# Altium PCB PCB6.PcbDoc
Units mm, origin at the board's own origin, x right, y up, seen from the top; angles counter-clockwise.
Board outline 43.07 x 32.08 mm, 2 copper layers (Top Layer, Bottom Layer); 34 components, 39 nets, 169 pads, 53 vias.
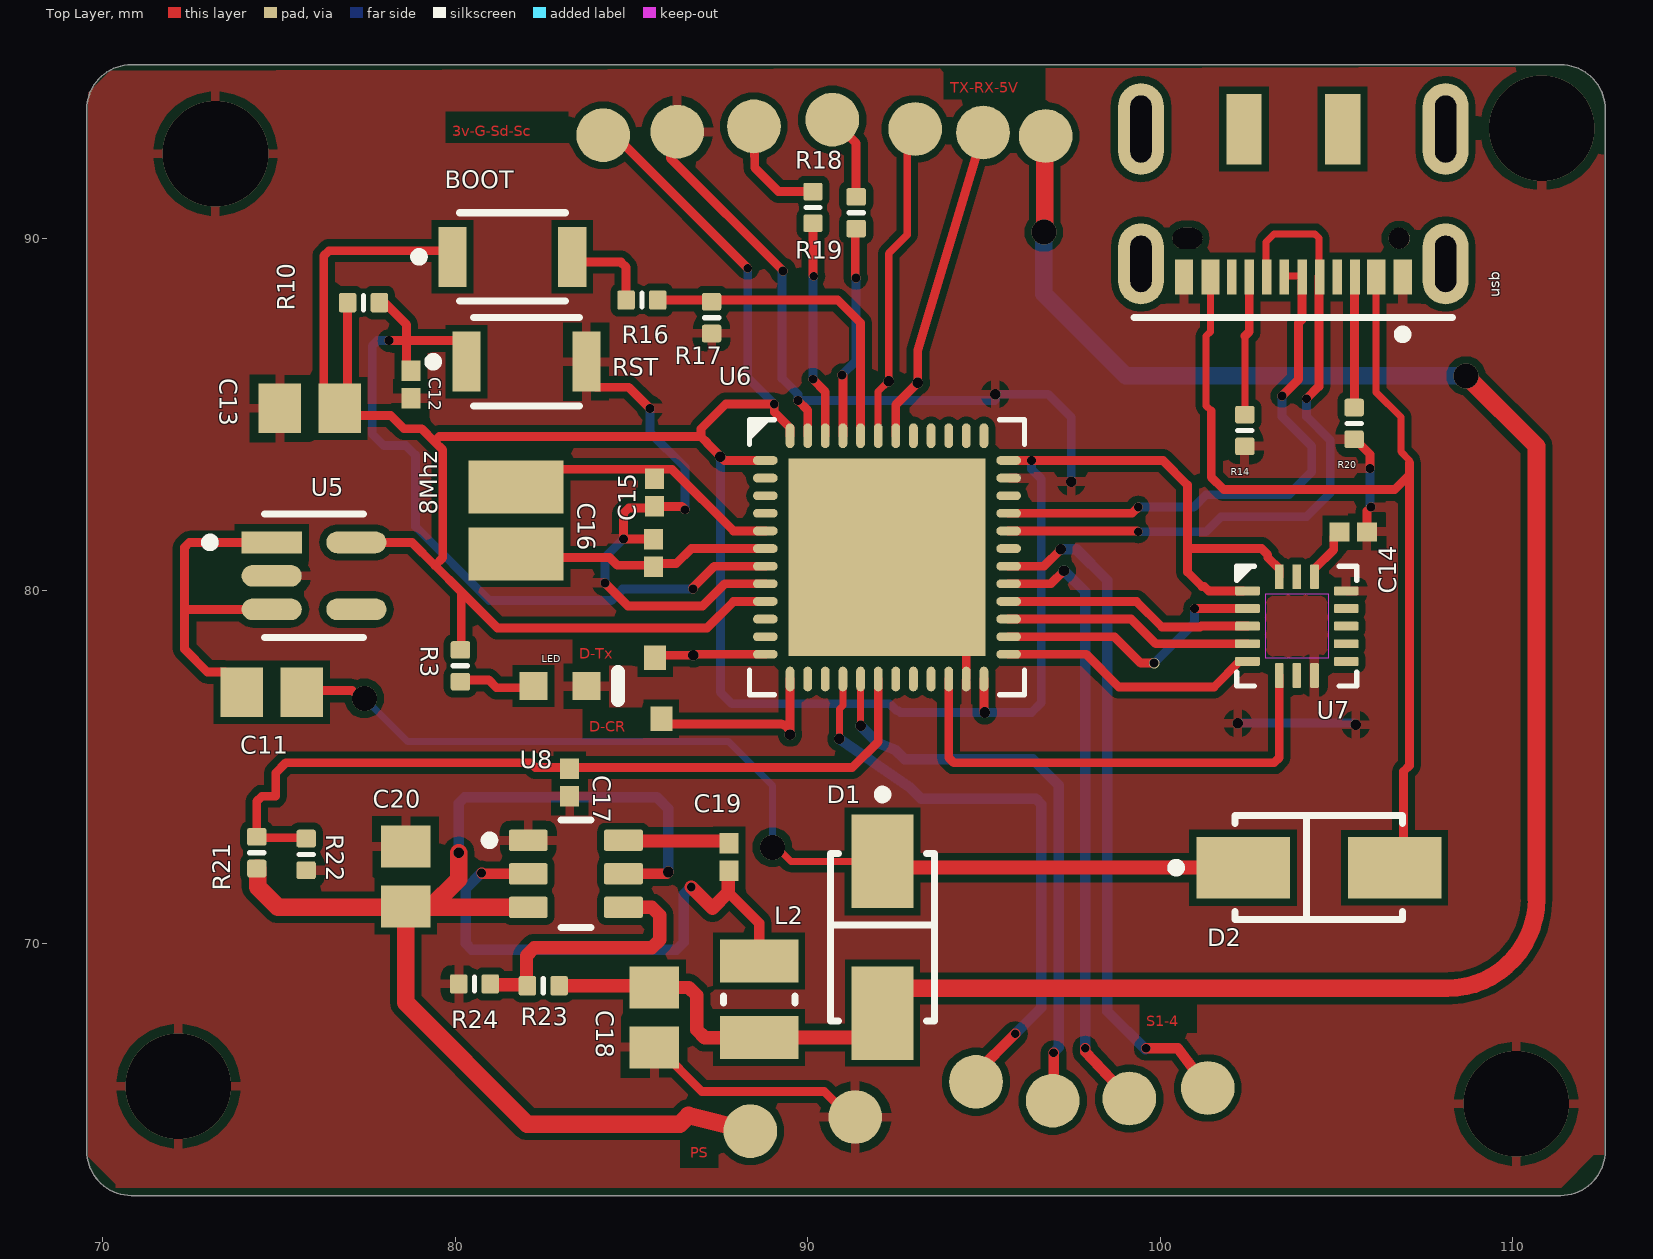
[diagram p0: Top Layer view]
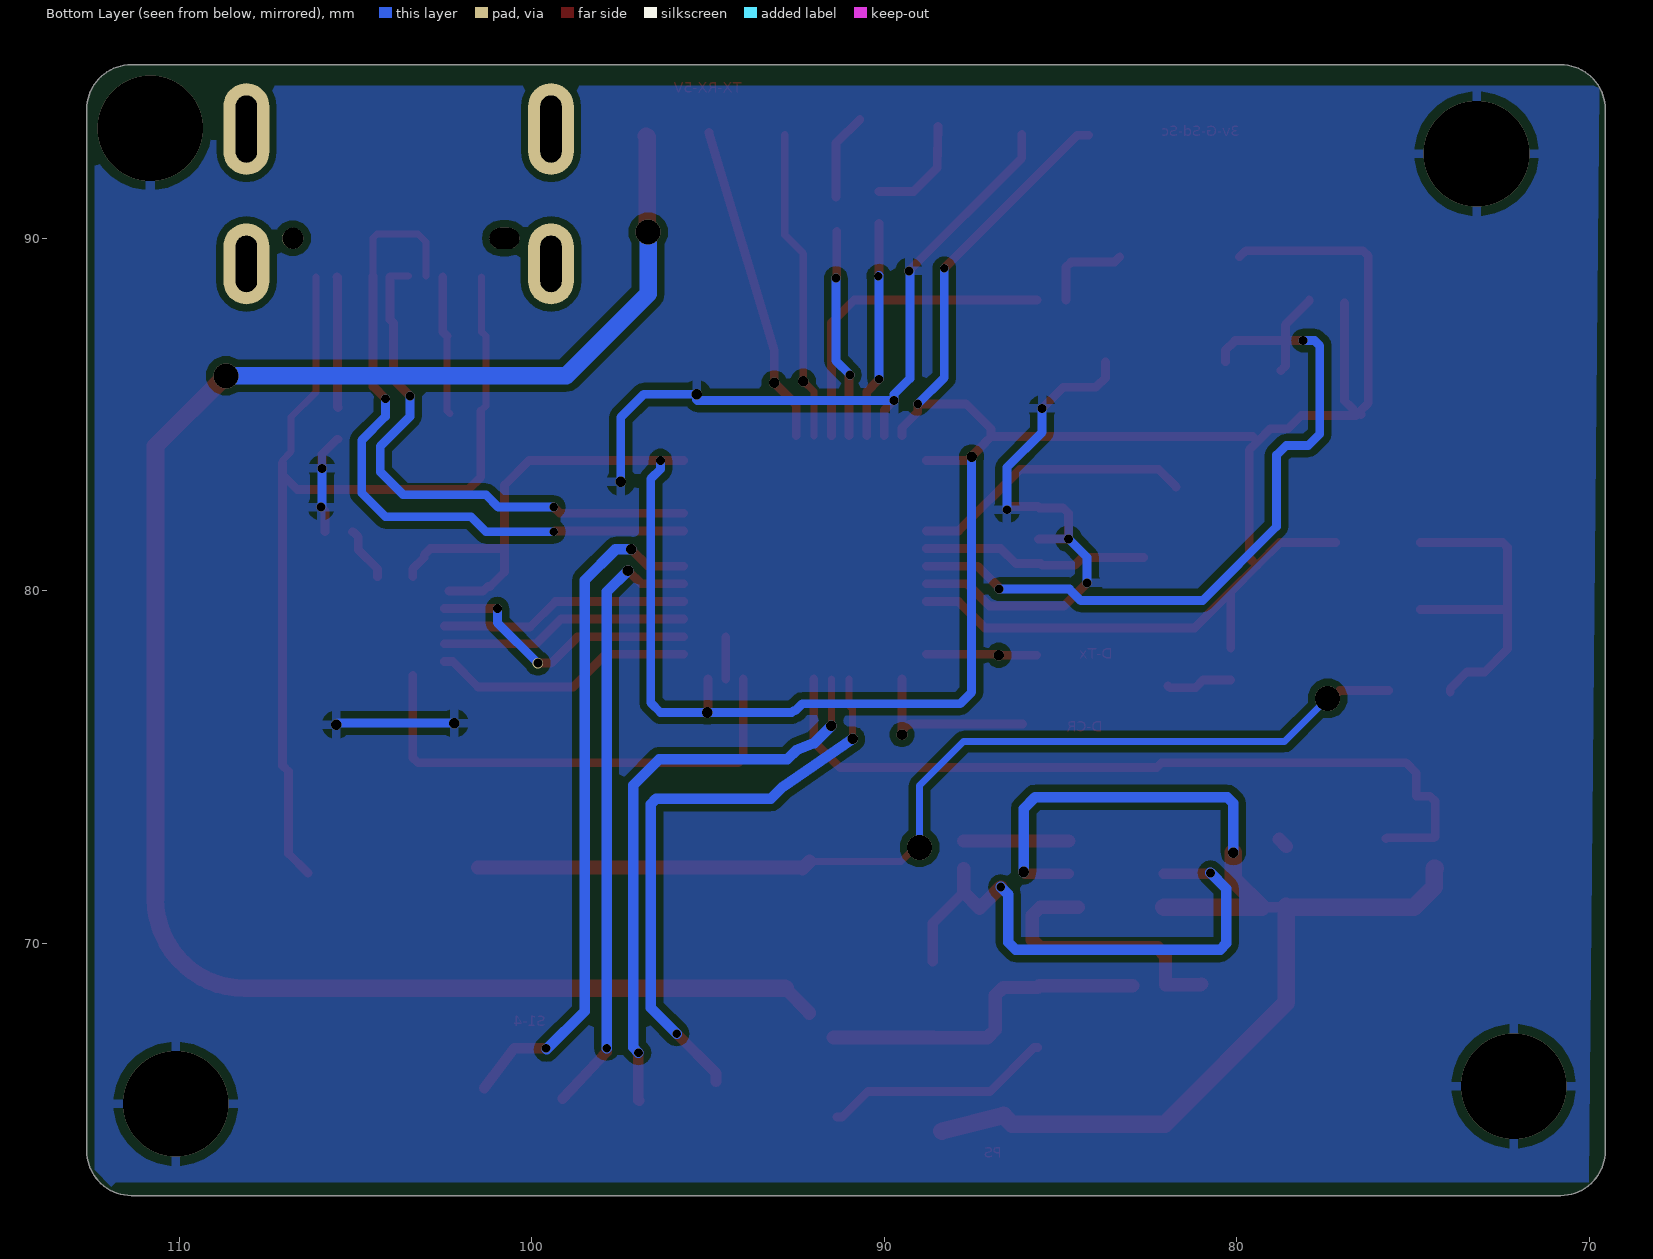
[diagram p1: Bottom Layer view, seen from below]
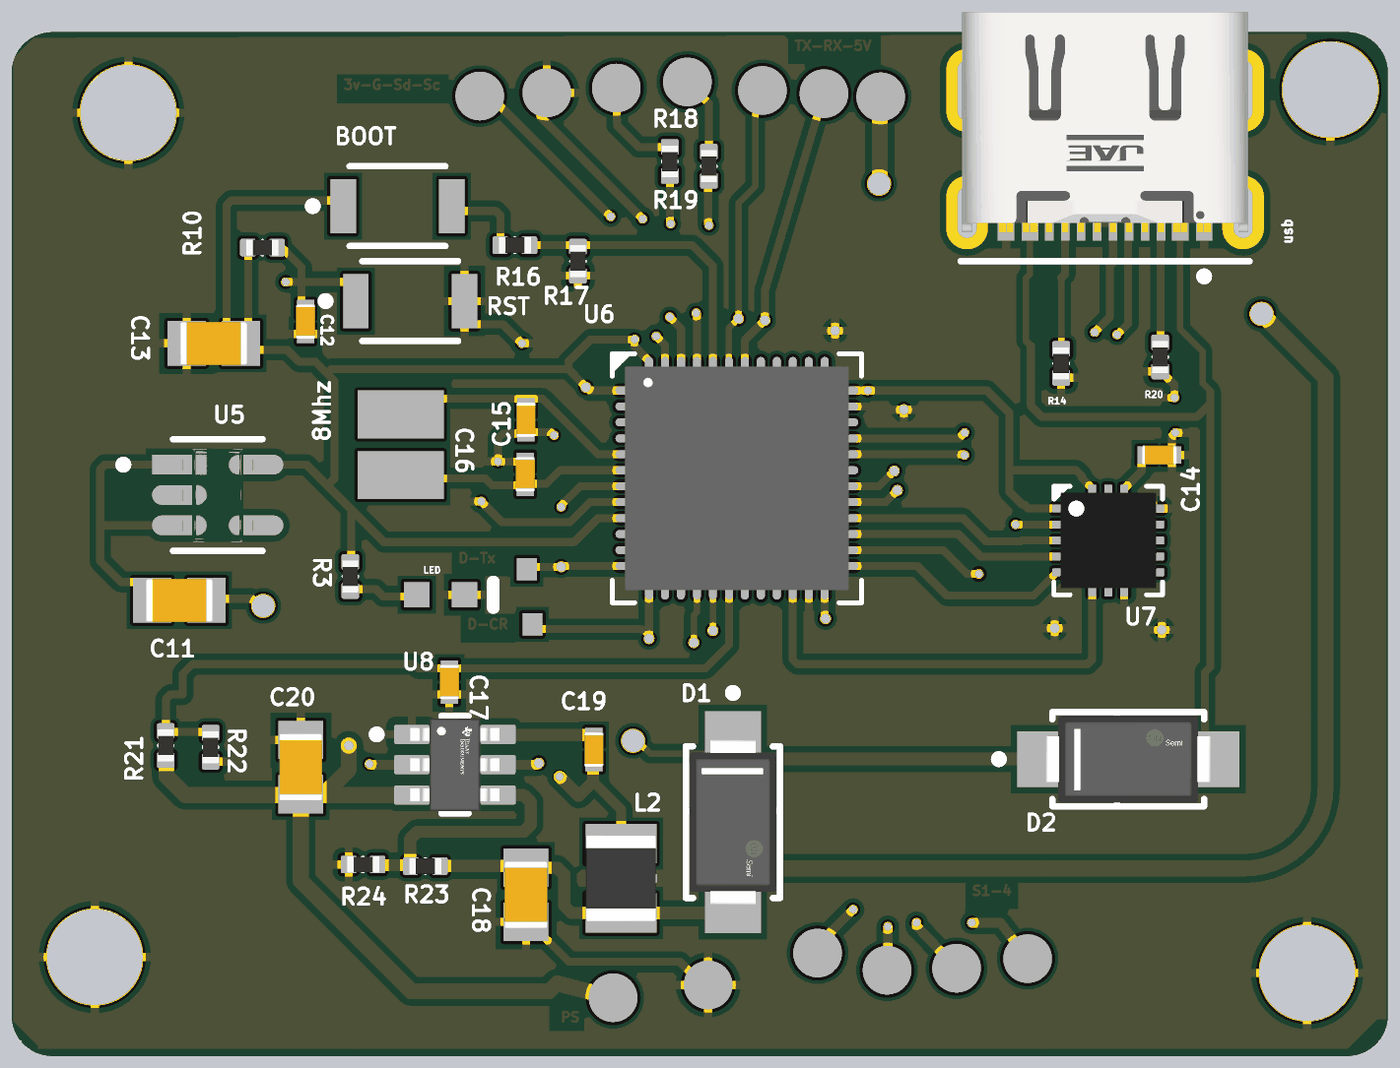
[diagram p2: 3D render of the assembled board from above, using the file's embedded part models]

## Layer stack, top to bottom
Top Solder: solder mask 0.0102, Solder Resist, Dk 3.5
Top Layer: signal copper 0.0356
Dielectric 1: dielectric 0.32, FR-4, Dk 4.8
Bottom Layer: signal copper 0.0356
Bottom Solder: solder mask 0.0102, Solder Resist, Dk 3.5

## Board outline
69.55,64.12 ccw(c70.82,64.12) 70.82,62.85 111.355,62.85 ccw(c111.355,64.12) 112.625,64.12 112.625,93.655 ccw(c111.355,93.655) 111.355,94.925 70.82,94.925 ccw(c70.82,93.655) 69.55,93.655

## Design rules (kind name [scope] priority, off if disabled: settings)
Clearance [All] p1: gap=0.2 ignorepadtopadclearanceinfootprint=FALSE
HoleSize [All] p1: absolutevalues=TRUE maxlimit=4 minlimit=0.025 maxpercent=80.000 minpercent=20.000
MinimumSolderMaskSliver [All] p1: minsoldermaskwidth=0
PolygonConnect [All] p1: connectstyle=Relief reliefconductorwidth=0.254 reliefentries=4 polygonreliefangle="90 Angle" airgapwidth=0.254
RoutingVias [All] p1: holewidth=0.711 width=1.27 viastyle="Through Hole" minholewidth=0.711 minwidth=1.27 maxholewidth=0.711 maxwidth=1.27
SilkToSilkClearance [All] p1: silktosilkclearance=0
SolderMaskExpansion [All] p1: expansion=0.102 istentingtop=FALSE
SupplyNets "Schematic Supply Nets" [InNet('GND')] p1: voltage=0.000
Width [All] p1: maxlimit=1.5 minlimit=0.15 preferedwidth=0.25
27 further rules are at their usual default settings.

## Classes and differential pairs
net class DS?_Nets: NetDS?_1 NetDS?_2
net class U8_Nets: GND NetC19_1 NetC19_2 NetR23_2 psu
net class U7_Nets: GND NetC14_1 NetU6_22 NetU6_25 NetU6_26 NetU6_27 NetU6_28 NetU7_7 NetU7_9 NetU7_10 NetU7_11 NetU7_12 NetU7_15
net class U6_Nets: "Drone CR" "Drone TX" "ELRS RX" "ELRS TX" GND Net8Mhz_1 NetC12_1 NetC17_1 NetJ?_A6 NetJ?_A7 NetR16_2 NetR18_1 NetR19_1 NetU6_2 NetU6_3 NetU6_4 NetU6_6 NetU6_10 NetU6_11 NetU6_14 NetU6_15 NetU6_19 NetU6_20 NetU6_21 NetU6_22 NetU6_25 NetU6_26 NetU6_27 NetU6_28 NetU6_31 NetU6_34 NetU6_37 NetU6_38 NetU6_39 NetU6_40 NetU6_41 "S1 ESC" "S2 ESC" "S3 ESC" "S4 ESC"
net class U5_Nets: GND NetC11_2 NetU5_4
net class SW3_Nets: GND NetC12_1
net class R24_Nets: GND NetR23_2
net class R23_Nets: NetC18_1 NetR23_2
net class R22_Nets: GND NetC17_1
net class R21_Nets: NetC17_1 psu
net class R20_Nets: GND NetJ?_A5
net class R19_Nets: NetR19_1 "sda oled"
net class R18_Nets: NetR18_1 "scl oled"
net class R17_Nets: GND NetR16_2
net class R16_Nets: NetR16_2
net class R14_Nets: GND NetJ?_B5
net class R10_Nets: NetC12_1
net class R3_Nets: NetD3_1
net class L2_Nets: NetC18_1 NetC19_2
net class J?_Nets: GND NetD2_1 NetJ?_A5 NetJ?_A6 NetJ?_A7 NetJ?_A8 NetJ?_B5 NetJ?_B8
net class D3_Nets: GND NetD3_1
net class D2_Nets: NetC11_1 NetD2_1
net class D1_Nets: NetC11_1 NetC18_1
net class C20_Nets: GND psu
net class C19_Nets: NetC19_1 NetC19_2
net class C18_Nets: GND NetC18_1
net class C17_Nets: GND NetC17_1
net class C16_Nets: GND Net8Mhz_2
net class C15_Nets: GND Net8Mhz_1
net class C14_Nets: GND NetC14_1
net class C13_Nets: GND
net class C12_Nets: GND NetC12_1
net class C11_Nets: NetC11_1 NetC11_2
net class 8Mhz_Nets: Net8Mhz_1 Net8Mhz_2

## Components (designator, comment, footprint, x,y, rotation, side; value= is the part's Value field where it differs from the comment)
8Mhz "NX3225GD-8MHZ-STD-CRA-3" NDK-NX3225GD-8MHZ-STD-CRA-3_V 81.725,82 r270 top
BOOT "B3U-1000P" OMRON-B3U-1000_V 81.625,89.475 r0 top
C11 "Capacitor 10 uF +/- 10% 16 V 0805" CAPC2013X135X45NL10T25 74.8,77.125 r180 top value=10µF
C12 "Capacitor 0.1 uF +/- 5% 16 V 0402" CAPC1005X56X25LL10T15 78.75,85.86 r270 top value=100nF
C13 "Capacitor 10 uF +/- 10% 16 V 0805" CAPC2013X135X45NL10T25 75.875,85.175 r180 top value=10µF
C14 "Capacitor 0.1 uF +/- 5% 16 V 0402" CAPC1005X56X25LL10T15 105.475,81.675 r0 top value=100nF
C15 "Capacitor 0.1 uF +/- 5% 16 V 0402" CAPC1005X56X25LL10T15 85.65,82.785 r270 top value=0.020nF
C16 "Capacitor 0.1 uF +/- 5% 16 V 0402" CAPC1005X56X25LL10T15 85.625,81.075 r90 top value=0.020nF
C17 "Capacitor 0.1 uF +/- 5% 16 V 0402" CAPC1005X56X25LL10T15 83.25,74.565 r270 top value=100nF
C18 "Capacitor 10 uF +/- 10% 16 V 0805" CAPC2013X135X45NL10T25 85.65,67.9 r270 top value=10µF
C19 "Capacitor 0.1 uF +/- 5% 16 V 0402" CAPC1005X56X25LL10T15 87.775,72.45 r270 top value=100nF
C20 "Capacitor 10 uF +/- 10% 16 V 0805" CAPC2013X135X45NL10T25 78.6,71.9 r90 top value=10µF
D1 "SS14" FP-403AE-MFG 92.125,70.175 r90 top
D2 "SS14" FP-403AE-MFG 104.5,72.15 r180 top
L2 "LQM2HPN2R2MG0L" INDC2520X100X60NL20T20 88.625,68.415 r270 top value=10µH
LED "HSMR-C190" AVAG-HSMX-C190_V 82.975,77.3 r0 top (schematic designator D3)
R3 "Resistor 2K37 +/-1 % 0402 63 mW" RESC0402(1005)_L 80.15,77.875 r270 top value=1K
R10 "Resistor 2K37 +/-1 % 0402 63 mW" RESC0402(1005)_L 77.4,88.175 r180 top value=10K
R14 "Resistor 2K37 +/-1 % 0402 63 mW" RESC0402(1005)_L 102.4,84.55 r270 top value=5.1K
R16 "100KR2F" RESC0402(1005)_L 85.3,88.25 r0 top value=1k
R17 "Resistor 2K37 +/-1 % 0402 63 mW" RESC0402(1005)_L 87.275,87.75 r90 top value=10K
R18 "Resistor 2K37 +/-1 % 0402 63 mW" RESC0402(1005)_L 91.375,90.725 r90 top value=4.5K
R19 "Resistor 2K37 +/-1 % 0402 63 mW" RESC0402(1005)_L 90.15,90.875 r90 top value=4.5K
R20 "Resistor 2K37 +/-1 % 0402 63 mW" RESC0402(1005)_L 105.5,84.75 r90 top value=5.1K
R21 "Resistor 2K37 +/-1 % 0402 63 mW" RESC0402(1005)_L 74.375,72.575 r90 top value=68K
R22 "Resistor 2K37 +/-1 % 0402 63 mW" RESC0402(1005)_L 75.775,72.525 r270 top value=10K
R23 "100KR2F" RESC0402(1005)_L 82.5,68.8 r180 top value=100k
R24 "Resistor 2K37 +/-1 % 0402 63 mW" RESC0402(1005)_L 80.55,68.85 r180 top value=13.3K
RST "B3U-1000P" OMRON-B3U-1000_V 82.025,86.5 r0 top (schematic designator SW3)
U5 "AP2112K-3.3TRG1" FP-SOT25-IPC_A 75.999,80.425 r0 top
U6 "STM32L452CEU6" STM-UFQFPN48_N 92.25,80.95 r0 top
U7 "ICM-20602" INSE-I62-16 103.875,79 r0 top
U8 "TPS54302DDCR" FP-DDC0006A-MFG 83.425,71.975 r0 top
usb "DX07S016JA3R1500" FP-DX07S016JA3R1500-MFG 103.775,91.95 r180 top (schematic designator J?)

## Footprints (in the part's own frame and the unit in brackets; to place one, negate y for a bottom-side part, rotate by r counter-clockwise, add the part's x,y. Pads: shape width x height; smd on the part's side, far side on the other; paste and mask are expansions set on the pad)
AVAG-HSMX-C190_V [mm] "SMD, 2-Leads, Body 1.6x0.8mm, Height 0.9mm"
  rect 0.8x0.8 smd: 1(-0.75,0) 2(0.75,0)
  silkscreen extent 1.65,-0.4 1.65,0.4, body extent -0.8,-0.4 0.8,0.4, height 0.9
CAPC1005X56X25LL10T15 [mm] "Chip Capacitor, 2-Leads, Body 1.10x0.60mm, IPC High Density"
  rect 0.58x0.54 smd: 1(-0.39,0) 2(0.39,0)
  body extent -0.55,-0.3 0.55,0.3, height 0.56
CAPC2013X135X45NL10T25 [mm] "Chip Capacitor, 2-Leads, Body 2.10x1.35mm, IPC Medium Density"
  rect 1.2x1.4 smd: 1(-0.85,0) 2(0.85,0)
  body extent -1.05,-0.67 1.05,0.67, height 1.35
FP-403AE-MFG [mm]
  rect 2.65x1.75 smd paste+0 mask+0: 1(-2.15,0) 2(2.15,0)
  silkscreen extent -2.37,-1.48 4.17,1.48, body extent -3.57,-1.58 3.57,1.58, height 0.25
FP-DDC0006A-MFG [mm]
  rrect17% 1.1x0.6 smd paste+0 mask+0: 1(-1.35,0.95) 2(-1.35,0) 3(-1.35,-0.95) 4(1.35,-0.95) 5(1.35,0) 6(1.35,0.95)
  silkscreen extent -2.57,-1.53 0.43,1.53, body extent -2,-1.63 2,1.63, height 0.25
FP-DX07S016JA3R1500-MFG [mm]
  rrect100% 1.3x2.3 hole 1.6 slot 0.6 at 0 deg paste-2539.97 mask+0: 1(-4.32,2.675) 2(4.32,2.675)
  rrect100% 1.3x2.6 hole 1.9 slot 0.6 at 0 deg paste-2539.97 mask+0: 3(-4.32,-1.15) 6(4.32,-1.15)
  rect 1x2 smd paste+0 mask+0: 4(-1.4,-1.15) 5(1.4,-1.15)
  rect 0.52x1 smd paste+0 mask+0: A1/B12(-3.1,3.05) A4/B9(-2.35,3.05) A12/B1(3.1,3.05) B4/A9(2.35,3.05)
  rect 0.27x1 smd paste+0 mask+0: A5(-1.75,3.05) A6(-0.25,3.05) A7(0.75,3.05) A8(1.75,3.05) B5(1.25,3.05) B6(0.25,3.05) B7(-0.75,3.05) B8(-1.25,3.05)
  round 0.6 hole 0.6 unplated paste-2539.97 mask+0: ""(-3,1.95)
  rrect100% 0.85x0.6 hole 0.6 slot 0.85 at 0 deg unplated paste-2539.97 mask+0: ""(3,1.95)
  silkscreen extent -4.52,4.2 4.52,4.8, body extent -5.07,-3.9 5.07,3.92, height 0.25
FP-SOT25-IPC_A [mm]
  rect 1.707x0.616 smd paste+0 mask+0: 1(-1.201,0.95)
  rrect100% 1.707x0.616 smd paste+0 mask+0: 2(-1.201,0) 3(-1.201,-0.95) 4(1.201,-0.95) 5(1.201,0.95)
  silkscreen extent -3.08,-1.75 1.4,1.75, body extent -2.55,-2 2.55,2, height 0.25
INDC2520X100X60NL20T20 [mm] "Chip Inductor, 2-Leads, Body 2.7x2.2mm, IPC Medium Density"
  rect 1.23x2.22 smd: 1(-1.085,0) 2(1.085,0)
  silkscreen extent -0.1,-1.01 0.1,1.01, body extent -1.35,-1.1 1.35,1.1, height 1
INSE-I62-16 [mm] "LGA, 16-Leads, Body 3x3mm, Pitch 0.5mm"
  rrect25% 0.7x0.25 smd: 1(-1.4,1) 2(-1.4,0.5) 3(-1.4,0) 4(-1.4,-0.5) 5(-1.4,-1) 9(1.4,-1) 10(1.4,-0.5) 11(1.4,0) 12(1.4,0.5) 13(1.4,1)
  rrect25% 0.25x0.7 smd: 6(-0.5,-1.4) 7(0,-1.4) 8(0.5,-1.4) 14(0.5,1.4) 15(0,1.4) 16(-0.5,1.4)
  Top Layer keep-out region: -0.9,-0.9 0.9,-0.9 0.9,0.9 -0.9,0.9
  silkscreen extent -1.7,-1.7 1.7,1.7, body extent -1.5,-1.5 1.5,1.5, height 0.75
NDK-NX3225GD-8MHZ-STD-CRA-3_V [mm] "SMD, 2-Leads, Body 3.2x2.5mm"
  rect 1.5x2.7 smd: 1(-0.95,0) 2(0.95,0)
  body extent -1.6,-1.25 1.6,1.25, height 1
OMRON-B3U-1000_V [mm] "SMD, 2-Leads, Body 3x2.5mm"
  rect 0.8x1.7 smd: 1(-1.7,0) 2(1.7,0)
  silkscreen extent -2.77,-1.25 1.5,1.25, body extent -1.5,-1.25 1.5,1.25, height 1.75
RESC0402(1005)_L [mm] "Chip Resistor, Body 1.0x0.5mm, IPC High Density"
  rrect25% 0.5x0.55 smd: 1(-0.45,0) 2(0.45,0)
  silkscreen extent 0,-0.2 0,0.2, body extent -0.5,-0.25 0.5,0.25, height 0.3
STM-UFQFPN48_N [mm]
  oval 0.7x0.25 smd: 1(-3.45,2.75) 2(-3.45,2.25) 3(-3.45,1.75) 4(-3.45,1.25) 5(-3.45,0.75) 6(-3.45,0.25) 7(-3.45,-0.25) 8(-3.45,-0.75) 9(-3.45,-1.25) 10(-3.45,-1.75) 11(-3.45,-2.25) 12(-3.45,-2.75) 25(3.45,-2.75) 26(3.45,-2.25) 27(3.45,-1.75) 28(3.45,-1.25) 29(3.45,-0.75) 30(3.45,-0.25) 31(3.45,0.25) 32(3.45,0.75) 33(3.45,1.25) 34(3.45,1.75) 35(3.45,2.25) 36(3.45,2.75)
  oval 0.25x0.7 smd: 13(-2.75,-3.45) 14(-2.25,-3.45) 15(-1.75,-3.45) 16(-1.25,-3.45) 17(-0.75,-3.45) 18(-0.25,-3.45) 19(0.25,-3.45) 20(0.75,-3.45) 21(1.25,-3.45) 22(1.75,-3.45) 23(2.25,-3.45) 24(2.75,-3.45) 37(2.75,3.45) 38(2.25,3.45) 39(1.75,3.45) 40(1.25,3.45) 41(0.75,3.45) 42(0.25,3.45) 43(-0.25,3.45) 44(-0.75,3.45) 45(-1.25,3.45) 46(-1.75,3.45) 47(-2.25,3.45) 48(-2.75,3.45)
  rect 5.6x5.6 smd paste-3: 49(0,0)
  silkscreen extent -3.9,-3.9 3.9,3.9, body extent -3.5,-3.5 3.5,3.5, height 0.55

## Part data
8Mhz: library part CMP-2000-07595-1, "Crystal Unit, 8 MHz, 8 pF, -40 to 150 degC, 2-Pin SMD, RoHS, Tape and Reel", Case/Package=SMD/SMT, ESR (Equivalent Series Resistance)=500Ohm, Frequency=8MHz, Frequency Stability=150ppm, Frequency Tolerance=50ppm, Load Capacitance=8pF, Manufacturer=NDK, Max Operating Temperature=150degC, Min Operating Temperature=-40degC, Package Description="2-Pin Surface Mount Device, Body 3.2 x 2.5 mm", Package Quantity=3000, Datasheet URL=http://www.ndk.com/images/products/catalog/c_NX3225GD-STD-CRA-3_e.pdf, Datasheet Version=11/2016, Height=0.039inch, Length=0.126inch, Manufacturer URL=http://www.ndk.com/en/, Mount=SurfaceMount, Mounting Technology=SurfaceMount, Number of Pins=2, Package Reference=NX3225GD-8MHZ-STD-CRA-3, Packaging=TapeandReel, RoHSCompliant=True, Width=0.098inch
BOOT RST: library part CMP-011-00000-2, "Tactile Switch, SPST-NO, 0.05 A, 12 V, -25 to 70 degC, 2-Pin SMD, RoHS, Tape and Reel", Case/Package=B3U-1000, Contact Current Rating=50mA, IP Rating=IP40, Manufacturer="Omron Electronic Components", Max Contact Resistance=100mohm, Max Operating Temperature=70°C, Max Voltage Rating (DC)=12V, Min Operating Temperature=-25°C, Operating Force=153gf, Package Description="2-Pin Surface Mount Device, Body 3 x 2.5 mm", Package Quantity=3500, Resistance=0.1Ohm, Contact Material=Silver, Current Rating=50mA, Datasheet URL=http://www.omron.com/ecb/products/pdf/en-b3u.pdf, Datasheet Version=Jan-15, Manufacturer URL=http://www.omron.com/, Max Current Rating=50mA, Mounting Technology=SM, Package Reference=B3U-1000, Packaging=TapeandReel, RoHS Compliant=True, Throw Configuration=SPST, Voltage Rating=12V, Voltage Rating (DC)=12V
C11 C13 C18 C20: library part CMP-001-00015-6, "Chip Capacitor, 10 uF, +/- 10%, 16 V, 0805 (2012 Metric)", Capacitor Type=Ceramic, Case/Package=0805, Max Operating Temperature=85°C, Min Operating Temperature=-55°C, Tolerance=10%, Voltage Rating=16V, Mounting Technology=SM, Pins=2, RoHS Compliant=True
C12 C14 C15 C16 C17 C19: library part CMP-001-00001-6, "Chip Capacitor, 0.1 uF, +/- 5%, 16 V, 0402 (1005 Metric)", Capacitor Type=Ceramic, Case/Package=0402, Max Operating Temperature=125°C, Min Operating Temperature=-55°C, Tolerance=5%, Voltage Rating=16V, Mounting Technology=SM, Pins=2, RoHS Compliant=True
D1 D2: library part CMP-2000-04943-2, "DIODE SCHOTTKY 40V 1A SMA", Forward Current=1A, Manufacturer="ON Semiconductor", Max Junction Temp=+125°C, Max Repetitive Reverse Voltage=40V, Max Surge Forward Current=40A, Package=403AE, Peak Reverse Current=0.2mA, Temperature="-65°C to +125°C", Temperature Range Low=-65°C, Automotive=No, Category=Diode, ComponentLink2Description=Datasheet, ComponentLink2URL=https://www.onsemi.com/pub/Collateral/SS19-D.PDF, Device Class L1="Discrete Semiconductors", Device Class L2=Diodes, Device Class L3="Schottky Diodes", Digikey Description="DIODE SCHOTTKY 40V 1A SMA", Height=2.5mm, Lead Free=Yes, Manufacturer Part Number=SS14, Mouser Description="Schottky Diodes & Rectifiers SMA 40V 1.0A", Octopart=https://octopart.com/ss14-on+semiconductor-29205033, RoHS=TRUE, Standoff Height=0.05mm, Temperature Range High=+125°C
L2: library part CMP-006-00009-6, "Chip Inductor, 2.2 uH, +/- 20%, -55 to 125 degC, 1008 (2520 Metric), RoHS, Tape and Reel", Case/Package=1008, Current Rating=1.3A, Manufacturer=Murata, Max Operating Temperature=125°C, Min Operating Temperature=-55°C, Package Description="2-Pin Surface Mounted Device, Body 2.5 x 2 mm", Package Quantity=3000, Self Resonant Frequency=40MHz, Tolerance=20%, Core Material=Ferrite, Datasheet URL=http://psearch.en.murata.com/inductor/product/LQM2HPN2R2MG0%23.pdf, Datasheet Version=Aug-16, Mounting Technology=SM, Package Reference=1008, Packaging=TapeandReel, RoHS Compliant=True, Shielding=Shielded
LED: library part CMP-007-00015-2, "LED Uni-Color Blue, 78 mW, 20 mA, -40 to 85 degC, 2-Pin SMD, RoHS, Tape and Reel", Case/Package=0603, Colour=Blue, Forward Current=20mA, Forward Voltage=3.4V, Manufacturer=Avago, Max Operating Temperature=85°C, Min Operating Temperature=-40°C, Package Description="2-Pin Surface Mount Device, Body 1.6 x 0.8 mm, Height 0.9 mm", Package Quantity=4000, Package Reference=HSMX-C190, Power=78mW, Datasheet URL=http://docs.avagotech.com/docs/AV02-0977EN, Datasheet Version=Apr-10, Illumination Colour=Blue, Lens Style=Diffused, Luminous Intensity=55mcd, Manufacturer URL=http://www.avagotech.com/, Mounting Technology=SM, Nominal Vf=3.4V, Packaging=TapeandReel, Pins=2, RoHS Compliant=True, Viewing Angle=155degrees
R3 R10 R14 R17 R18 R19 R20 R21 R22 R24: library part CMP-009-00162-3, "Chip Resistor, 2,37 kOhms, +/-1 %, 63 mW, -55 to 155 degC, 0402", Case/Package=0402, Max Operating Temperature=155°C, Min Operating Temperature=-55°C, Power=63mW, Tolerance=1%, Pins=2
R16 R23: library part CMP-009-00064-2, "100K 0.063W 1% 0402 (1005 Metric)  SMD", Case/Package=0402, Power=63mW, Tolerance=1%, Mounting Technology=SMT, Pins=2
U5: library part CMP-12756-000035-1, "IC REG LINEAR 3.3V 600MA SOT25", Case/Package=SOT-23-5, Dropout Voltage=250mV, Max Input Voltage=6V, Max Operating Temperature=85°C, Max Output Current=600mA, Min Input Voltage=2.5V, Min Operating Temperature=-40°C, Output Voltage=3.3V, Package Quantity=1, Quiescent Current=55uA, Accuracy=1.5%, Height=1.3mm, Lead Free="Lead Free", Length=3.1mm, Mount="Surface Mount", Number of Outputs=1, Number of Pins=5, Number of Regulators=1, Output Current=600mA, Output Type=Fixed, Packaging="Tape and Reel", Polarity=Positive, Width=1.7mm
U6: library part CMP-020-00022-3, "ARM® Cortex®-M4 STM32L4 Microcontroller IC 32-Bit 80MHz 512KB (512K x 8) FLASH 48-UFQFPN (7x7)", Case/Package=UFQFN-48, Min Supply Voltage=2V, ComponentLink1Description="Manufacturer URL", ComponentLink1URL=http://www.st.com/, ComponentLink2Description=Datasheet, ComponentLink2URL=http://www.st.com/st-web-ui/static/active/en/resource/technical/document/datasheet/CD00161566.pdf, I/Os=38, Mounting Technology="Surface Mount", Pins=49, RAM Size=160, RoHS Compliant=Yes
U7: library part CMP-010-00023-3, "High Performance 6-Axis MEMS MotionTracking(TM) Device, 1.71 to 3.45 V, -40 to 85 degC, 16-Pin LGA, RoHS", Case/Package=LGA-16, Max Operating Temperature=85°C, Max Supply Voltage=3.45V, Min Operating Temperature=-40°C, Min Supply Voltage=1.71V, Mounting Technology=SMT, Pins=16, RoHS Compliant=Yes, Sensor Type="6 Axis,Accelerometer,Gyroscope,Temperature"
U8: library part CMP-04918-000032-1, "IC REG BUCK ADJ 3A TSOT23-6", Manufacturer="Texas Instruments", Max Junction Temp=+125°C, Max Supply Voltage=28V, Min Supply Voltage=4.5V, Nominal Supply Current=45uA, Output Current=3A, Output Voltage=0.6-26V, Package=DDC0006A, Switching Frequency=400kHz, Temperature="-40°C to +125°C", Temperature Range Low=-40°C, Automotive=No, Category=IC, ComponentLink2Description=Datasheet, ComponentLink2URL=http://www.ti.com/lit/ds/symlink/tps54302.pdf, Device Class L1="Integrated Circuits (ICs)", Device Class L2="Power Management ICs", Device Class L3="Voltage Regulators - Switching", Digikey Description="IC REG BUCK ADJ 3A TSOT23-6", Height=1.1mm, Ipc Land Pattern Name=SOT95P280X110-6, Lead Free=Yes, Manufacturer Part Number=TPS54302DDCR, Max Duty Cycle=100%, Number of Outputs=1, Octopart=https://octopart.com/tps54302ddcr-texas+instruments-74209025, Output Type=AdjustableProgrammable, RoHS=TRUE, Standoff Height=0mm, Switching Topology=Buck, Temperature Range High=+125°C
usb: library part CMP-19038-000002-1, "CONN RCP USB2.0 TYP C 24P SMD RA"

## Free pads (board coordinates)
  round 1.524 smd: 2(88.375,64.675) 2(91.35,65.075) 2(94.775,66.075) 2(96.95,65.538) 2(99.125,65.6) 2(101.35,65.9) 3(84.2,92.925) 3(86.3,93.025) 3(88.475,93.175) 3(90.7,93.367) 3(93.05,93.1) 3(94.975,93) 5V(96.75,92.9)
  rect 0.624x0.7 smd: 8(85.675,78.1) 8(85.85,76.375)

## Via types
v1: diameter 0.25, hole 0.25, Top Layer to Bottom Layer, 28 vias
v2: diameter 0.3, hole 0.3, Top Layer to Bottom Layer, 16 vias
v3: diameter 3, hole 3, Top Layer to Bottom Layer, 4 vias
v4: diameter 0.711, hole 0.711, Top Layer to Bottom Layer, 4 vias
v5: diameter 0.3, hole 0.25, Top Layer to Bottom Layer, 1 vias

## Nets (pads, with @x,y where several pads share a name; then routed paths per layer and width w, separated by ;. In a path a pad name is that pad's centre, name@x,y a point inside that pad or via, vN(x,y) a via of type N, cw(c..) or ccw(c..) an arc to the next point about the centre after c; other vN are vias at no path point)
"Drone CR": pad.8@85.85,76.375 U6.13 | length 5.2
  Top Layer w0.25: pad.8@86.075,76.225 89.2,76.225 cw(c89.2,75.925) v2(89.5,75.925) U6.13
"Drone TX": pad.8@85.675,78.1 U6.12 | length 3.2
  Top Layer w0.1: pad.8@85.65,78.15 cw(c85.675,78.15) pad.8@85.675,78.175
  Top Layer w0.25: pad.8@85.675,78.175 v2(86.75,78.175) 86.764,78.175 86.789,78.2 U6.12
"ELRS RX": pad.3@94.975,93 U6.42 | length 9.1
  Top Layer w0.25: U6.42 92.5,85.275 v2(93.125,85.9) 93.125,86.825 pad.3@94.975,93
"ELRS TX": pad.3@93.05,93.1 U6.43 | length 8.9
  Top Layer w0.2: U6.43 92,85.65 v2(92.3,85.95) 92.3,89.575 92.825,90.1 pad.3@92.825,92.95
GND: C12.2 C13.2 C14.2 C15.2 C16.2 C17.2 C18.2 C20.2 LED.2 pad.2@91.35,65.075 pad.3@86.3,93.025 R14.2 R17.1 R20.1 R22.2 R24.2 RST.2 U5.2 U6.8 U6.23 U6.35 U6.47 U6.49 U7.8 U7.13 U8.1 usb.A1/B12 usb.A12/B1 | length 50.2
  Top Layer w0.25: RST.2 83.725,86.05 84,85.775 84.925,85.775 v1(85.525,85.175) ; v1@84.247,80.228 84.9,79.575 87.025,79.575 87.65,80.2 U6.8 ; C16.2 85.615,81.475 v1(84.775,81.475) 84.775,82.2 84.925,82.35 85.605,82.35 C15.2 86.43,82.395 v1(86.525,82.3) ; C18.2 85.75,67.05 87,65.8 90.467,65.8 91.192,65.075 pad.2@91.35,65.075 ; pad.3@86.1,92.95 86.1,92.275 v1(89.3,89.075) ; v1(89.725,85.4) 90,85.125 U6.47 ; U6.23 U6.49@94.5,78.7 ; R20.1 105.525,84.3 105.95,83.875 v1(105.95,83.475) ; C14.2 105.865,82.265 v1(105.975,82.375)
  Top Layer w0.381: C20.2 C20.2@78.8,72.95
  Bottom Layer w0.25: v1(84.25,80.225) 84.25,80.95 v1(84.775,81.475) ; v1(85.525,85.175) 85.525,84.5 86.525,83.5 v1(86.525,82.3) ; v1(89.3,89.075) 89.275,89.05 89.275,86.025 89.725,85.575 v1(89.725,85.4) 95.3,85.4 95.325,85.425 ; v2(95.325,85.575) 96.825,85.575 97.475,84.925 v2(97.475,83.1) ; v2(102.2,76.25) 105.5,76.25 v2(105.55,76.2) ; v1(105.95,83.475) 105.95,82.4 v1(105.975,82.375)
  other v3: 110.1,65.45 72.15,65.95 73.2,92.4 110.825,93.125
Net8Mhz_1: 8Mhz.1 C15.1 U6.5 | length 8
  Top Layer w0.25: 8Mhz.1 82.225,83.45 86.15,83.45 87.9,81.7 U6.5
Net8Mhz_2: 8Mhz.2 C16.1 U6.6 | length 6.4
  Top Layer w0.25: 8Mhz.2@82.65,80.95 84.375,80.95 84.6,80.725 85.525,80.725 85.575,80.775 86.275,80.775 86.7,81.2 U6.6
NetBOOT_1: BOOT.1 C13.1 pad.3@84.2,92.925 R3.1 R10.2 U5.5 U6.1 U6.9 U6.24 U6.36 U6.48 U7.1 U7.16 | length 93
  Top Layer w0.25: C13.1@76.475,85 C13.1@76.537,85.062 ; C13.1 76.95,85.4 R10.2 ; U5.5 78.775,81.375 79.431,80.719 ; BOOT.1 79.75,89.65 76.421,89.65 76.275,89.504 76.275,85.325 C13.1@76.537,85.062 ; R3.1@80.175,78.375 80.175,79.975 ; pad.3@84.2,92.925 84.525,92.925 v1(88.3,89.15) ; U6.9 87.9,79.7 87.15,78.95 81.2,78.95 80.175,79.975 ; U6.1 87.639,83.7 87.539,83.8 v2(87.525,83.8) 87.525,83.814 87.162,84.177 87.162,84.188 86.975,84.375 ; U6.48 89.5,84.625 89.05,85.075 v1(89.05,85.3) 87.675,85.3 86.975,84.6 86.975,84.375 ; U6.24 95,76.589 95.025,76.564 v2(95.025,76.55) ; U6.36 100.075,83.7 100.775,83 100.775,81.2 ; U7.1@102.35,80 101.375,80 101.25,80.125 101.184,80.125 100.775,80.534 100.775,81.2 ; U7.16 103.375,80.625 103.052,80.948 103.052,81.023 102.875,81.2 100.775,81.2 ; C13.1@76.537,85.062 76.625,84.975 78.175,84.975 78.55,84.6 79.05,84.6 79.413,84.237 ; 79.413,84.237 79.55,84.375 86.975,84.375 ; 79.413,84.237 79.65,84 79.65,80.938 79.431,80.719 ; 79.431,80.719 80.175,79.975
  Bottom Layer w0.25: v2(87.525,83.8) 87.525,77.125 87.85,76.8 92.325,76.8 92.525,76.6 92.575,76.6 92.625,76.55 v2(95.025,76.55) 96.35,76.55 96.625,76.825 96.625,83.175 96.35,83.45 v1(96.35,83.7) ; v1(88.3,89.15) 88.3,86.05 v1(89.05,85.3)
NetBOOT_2: BOOT.2 R16.1 | length 2.6
  Top Layer w0.25: BOOT.2 83.475,89.325 84.704,89.325 84.85,89.179 R16.1
NetC11_1: C11.1 D1.2 D2.2 | length 28.9
  Top Layer w0.2: v4(89,72.725) 89.127,72.725 89.527,72.325 D1.2
  Top Layer w0.25: C11.1@75.7,77.175 77.075,77.175 77.3,76.95 v4(77.425,76.95)
  Top Layer w0.4: D1.2 D1.2@92.325,72.125 ; D1.2@92.325,72.15 D2.2@101.525,72.15
  Bottom Layer w0.2: v4(77.425,76.95) 78.652,75.722 87.753,75.722 89,74.475 v4(89,72.725)
NetC11_2: C11.2 U5.1 U5.3 | length 10.1
  Top Layer w0.25: C11.2 73.95,77.225 73.475,77.7 72.975,77.7 72.321,78.354 72.321,79.475 ; U5.3 72.321,79.475 ; U5.1 72.468,81.375 72.321,81.229 72.321,79.475
NetC12_1: C12.1 R10.1 RST.1 U6.7 | length 22.7
  Top Layer w0.25: R10.1@77.95,88.25 77.95,88.225 78.625,87.55 78.625,87.1 ; v1(78.125,87.1) 78.625,87.1 ; C12.1 78.625,86.375 78.625,87.1 ; RST.1 80.325,86.825 80.05,87.1 78.625,87.1 ; v1(86.75,80.05) 86.75,80.1 87.35,80.7 U6.7
  Bottom Layer w0.25: v1(78.125,87.1) 77.796,87.1 77.65,86.954 77.65,84.45 77.975,84.125 78.6,84.125 78.875,83.85 78.875,81.825 80.975,79.725 84.425,79.725 84.75,80.05 v1(86.75,80.05)
NetC14_1: C14.1 U7.14 | length 1.6
  Top Layer w0.25: U7.14 104.375,80.625 104.92,81.17 104.92,81.53 105.065,81.675 C14.1
NetC17_1: C17.1 R21.2 R22.1 U6.18 | length 23
  Top Layer w0.25: R22.1 75.75,73 74.4,73 R21.2 74.375,74.029 74.521,74.175 74.91,74.175 74.91,74.835 75.2,75.125 82.14,75.125 82.275,74.99 82.775,74.99 83.225,74.99 91.265,74.99 92,75.725 U6.18
NetC18_1: C18.1 D1.1 L2.2 pad.5V R23.1 | length 63.1
  Top Layer w0.381: R23.1 85.6,68.8 C18.1 86.627,68.75 86.85,68.527 86.85,67.553 87.073,67.33 L2.2 ; D1.1 92.125,68.041 D1.1@92.809,68.725
  Top Layer w0.4: L2.2 D1.1@91.441,67.33
  Top Layer w0.5: D1.1@92.809,68.725 108.135,68.725 ccw(c108.135,71.265) 110.675,71.265 110.675,84.1 v4(108.675,86.1) ; v4(96.7,90.175) 96.725,90.2 96.725,92.875 pad.5V
  Bottom Layer w0.5: v4(96.7,90.175) 96.7,88.425 99.025,86.1 v4(108.675,86.1)
NetC19_1: C19.1 U8.6 | length 3
  Top Layer w0.381: U8.6@84.775,72.905 C19.1@87.75,72.905
NetC19_2: C19.2 L2.1 U8.2 | length 16
  Top Layer w0.3: v1(80.75,72) 80.775,71.975 U8.2 ; 87.75,71.45 88.625,70.575 L2.1
  Top Layer w0.381: v1(86.7,71.6) 87.3,71 87.75,71.45 C19.2@87.75,72.125
  Bottom Layer w0.3: v1(80.75,72) 80.3,71.55 80.3,70.001 80.476,69.825 86.274,69.825 86.487,70.038 86.487,71.387 v1(86.7,71.6)
NetD2_1: D2.1 usb.A4/B9 usb.B4/A9 | length 29.5
  Top Layer w0.2: usb.B4/A9 101.425,87.35 101.3,87.225 101.3,85.25 101.45,85.1 ; usb.A4/B9 106.125,85.634 106.825,84.934 106.825,83.947 107.075,83.697 107.075,83.463
  Top Layer w0.25: 101.45,85.1 101.45,83.225 101.8,82.875 106.65,82.875 107.075,83.3 ; D2.1@106.35,72 106.9,72.55 106.9,74.875 107.075,75.05 107.075,83.3 ; 107.075,83.625 107.075,83.463 107.075,83.3
NetD3_1: LED.1 R3.2 | length 1.9
  Top Layer w0.25: R3.2@80.175,77.475 80.95,77.475 81.175,77.25 81.9,77.25 LED.1@81.95,77.3
NetJ?_A5: R20.2 usb.A5 | length 3.7
  Top Layer w0.25: R20.2 105.515,85.215 105.515,88.89 usb.A5
NetJ?_A6: U6.33 usb.A6 usb.B6 | length 15.7
  Top Layer w0.2: usb.B6@103.5,88.925 usb.A6@104,88.925
  Top Layer w0.25: U6.33 99.2,82.2 v1(99.375,82.375) ; v1(103.45,85.525) 103.925,86 103.925,87.6 104.025,87.7 usb.A6
  Bottom Layer w0.25: v1(99.375,82.375) 100.95,82.375 101.3,82.725 103.65,82.725 104.3,83.375 104.3,84.1 103.45,84.95 v1(103.45,85.525)
NetJ?_A7: U6.32 usb.A7 usb.B7 | length 19.9
  Top Layer w0.2: usb.A7@103,88.925 103,89.9 103.225,90.125 104.383,90.125 104.5,90.008 usb.B7@104.5,88.925
  Top Layer w0.25: U6.32 99.35,81.7 v1(99.375,81.675) ; v1(104.15,85.45) 104.5,85.8 usb.B7@104.5,88.925
  Bottom Layer w0.25: v1(99.375,81.675) 101.3,81.675 101.725,82.1 104.15,82.1 104.825,82.775 104.825,84.275 104.15,84.95 v1(104.15,85.45)
NetJ?_B5: R14.1 usb.B5 | length 4
  Top Layer w0.2: R14.1@102.325,85.025 102.4,85.1 102.4,87.225
  Top Layer w0.25: 102.4,87.225 102.525,87.35 usb.B5
NetR16_2: R16.2 R17.2 U6.44 | length 9.3
  Top Layer w0.25: R16.2@85.672,88.25 88.35,88.25 90.85,88.25 91.5,87.6 U6.44
NetR18_1: R18.1 U6.45 | length 6
  Top Layer w0.25: v1(90.975,86.125) 91,86.1 U6.45 ; R18.1@91.35,90.2 91.35,88.9 v1(91.375,88.875)
  Bottom Layer w0.25: v1(90.975,86.125) 91.375,86.525 v1(91.375,88.875)
NetR19_1: R19.1 U6.46 | length 6.2
  Top Layer w0.25: v1(90.15,86) 90.5,85.65 U6.46 ; R19.1 90.15,88.95 v1(90.175,88.925)
  Bottom Layer w0.25: v1(90.15,86) v1@90.15,88.95
NetR23_2: R23.2 R24.1 U8.4 | length 7.9
  Top Layer w0.381: R24.1 81.025,68.825 82.025,68.825 82.025,69.652 82.248,69.875 85.577,69.875 85.8,70.098 85.8,70.802 85.577,71.025 U8.4@84.5,71.025
NetU6_22: U6.22 U7.6 | length 14.1
  Top Layer w0.25: U6.22 94,75.271 94.146,75.125 103.229,75.125 103.375,75.271 U7.6
NetU6_25: U6.25 U7.5 | length 7.5
  Top Layer w0.25: U6.25 97.9,78.2 98.825,77.275 101.525,77.275 102.25,78 U7.5
NetU6_26: U6.26 U7.2 | length 8
  Top Layer w0.25: U6.26 98.7,78.7 99.45,77.95 v5(99.825,77.95) ; v1(100.975,79.5) U7.2
  Bottom Layer w0.25: v5(99.825,77.95) 100.975,79.1 v1(100.975,79.5)
NetU6_27: U6.27 U7.4 | length 7.1
  Top Layer w0.25: U6.27 99.175,79.2 99.875,78.5 U7.4
NetU6_28: U6.28 U7.3 | length 7.1
  Top Layer w0.25: U6.28 99.325,79.7 100.05,78.975 101.137,78.975 101.162,79 U7.3
psu: C20.1 pad.2@88.375,64.675 R21.1 U8.3 U8.5 | length 35.1
  Top Layer w0.3: C20.1@78.6,71.025 79.3,71.025 ; U8.5 86,71.975 v2(86.05,72.025)
  Top Layer w0.5: R21.1 74.4,72.125 74.4,71.6 74.975,71.025 C20.1@78.6,71.025 ; C20.1 78.6,68.325 82.05,64.875 86.372,64.875 86.622,65.125 pad.2@88.375,64.675 ; v2(80.1,72.575) 80.1,71.825 79.3,71.025 U8.3
  Bottom Layer w0.3: v2(80.1,72.575) 80.1,73.974 80.276,74.15 85.725,74.15 86.05,73.825 v2(86.05,72.025)
"S1 ESC": pad.2@94.775,66.075 U6.16 | length 16.7
  Top Layer w0.2: v2(90.9,75.8) 90.9,76.652 91,76.752 U6.16
  Top Layer w0.3: pad.2@94.775,66.075 94.775,66.325 v1(95.888,67.438)
  Bottom Layer w0.3: v2(90.9,75.8) 92.9,74.425 93.225,74.1 96.475,74.1 96.625,73.95 96.625,68.175 v1(95.888,67.438)
"S2 ESC": pad.2@96.95,65.538 U6.17 | length 16.6
  Top Layer w0.2: v2(91.5,76.175) U6.17
  Top Layer w0.3: pad.2@96.95,65.538 96.975,65.55 v1(96.975,66.9)
  Bottom Layer w0.3: v2(91.5,76.175) 91.948,75.727 91.992,75.683 92.492,75.483 92.75,75.225 96.383,75.225 97.125,74.483 97.125,67.05 v1(96.975,66.9)
"S3 ESC": pad.2@99.125,65.6 U6.29 | length 17.4
  Top Layer w0.25: U6.29 96.898,80.2 v2(97.272,80.573)
  Top Layer w0.3: v1(97.875,67.025) 97.875,66.925 pad.2@99.125,65.6
  Bottom Layer w0.3: v2(97.272,80.573) 97.875,79.97 v1(97.875,67.025)
"S4 ESC": pad.2@101.35,65.9 U6.30 | length 19.4
  Top Layer w0.25: U6.30 96.7,80.7 v2(97.175,81.175)
  Top Layer w0.3: v1(99.6,67.025) 100.5,67.025 pad.2@101.35,65.9
  Bottom Layer w0.3: v2(97.175,81.175) 97.625,81.175 98.5,80.3 98.5,68.075 v1@99.581,66.994
"scl oled": pad.3@90.7,93.367 R18.2 | length 2.5
  Top Layer w0.25: pad.3@90.7,93.367 91.375,92.692 R18.2
"sda oled": pad.3@88.475,93.175 R19.2 | length 3.1
  Top Layer w0.25: pad.3@88.475,93.175 88.5,92 89.175,91.325 R19.2
pads on no net: U5.4 U6.2 U6.3 U6.4 U6.10 U6.11 U6.14 U6.15 U6.19 U6.20 U6.21 U6.31 U6.34 U6.37 U6.38 U6.39 U6.40 U6.41 U7.7 U7.9 U7.10 U7.11 U7.12 U7.15 usb. usb.1 usb.2 usb.3 usb.4 usb.5 usb.6 usb.A8 usb.B8

## Polygon pours and split planes (outlines as drawn)
GND on Bottom Layer "GND_L02_P008" (solid, pour order 8): 69.725,94.45 69.85,94.325 112.4,94.325 112.4,63.575 111.925,63.1 111.8,63.225 70.025,63.225
GND on Bottom Layer "GND_L02_P002" (solid, pour order 2): 109.05,94.675 109.375,94.35 112.175,94.35 112.175,90.85 112.075,90.75 109.075,90.75
GND on Top Layer "GND_L01_P007" (solid, pour order 7): 70.225,94.75 69.6,94.125 69.6,63.95 70.375,63.175 70.375,63.075 111.375,63.075 112.3,64 112.575,64 112.575,93.575 111.525,94.625 111.525,94.875

## Other copper
Top Layer:
  text "TX-RX-5V" at 94.05,94.125 h0.3
  text "3v-G-Sd-Sc" at 79.925,92.9 h0.3
  text "D-Tx" at 83.525,78.075 h0.3
  text "D-CR" at 83.8,76 h0.3
  text "S1-4" at 99.6,67.65 h0.3
  text "PS" at 86.675,63.925 h0.3

## Silkscreen, mask and mechanical layers (free items; w line width, h text height)
Mechanical 1:
  lines w0.254: 69.55,64.12 ccw(c70.82,64.12) 70.82,62.85 111.355,62.85 ccw(c111.355,64.12) 112.625,64.12 112.625,93.655 ccw(c111.355,93.655) 111.355,94.925 109.1,94.925 70.82,94.925 ccw(c70.82,93.655) 69.55,93.655 69.55,64.12